# EAGLE board BlueCom_Board (EAGLE 6.2)
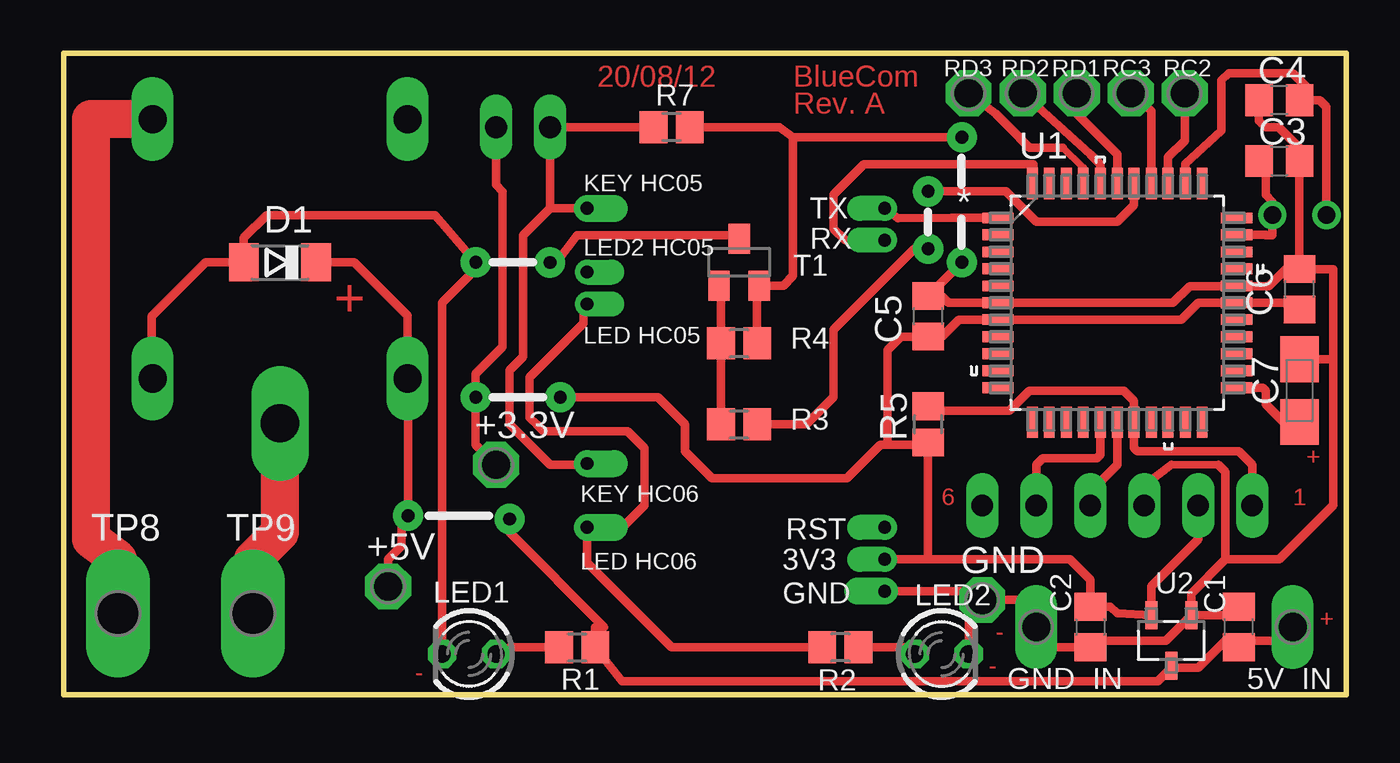
[diagram p0: board, top side]
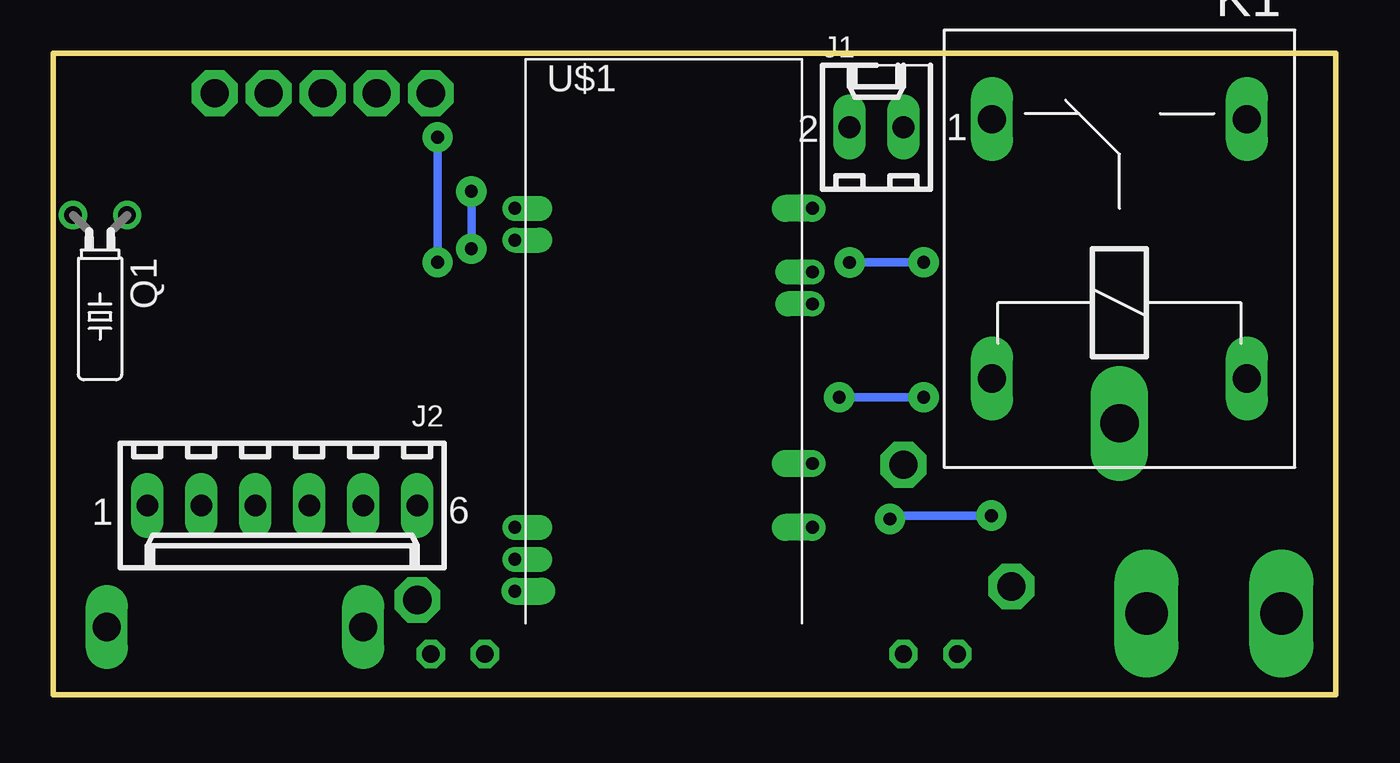
[diagram p1: board, bottom side, seen from below]

Size 60.3 x 30.15 mm. Coordinates in mm from the lower left corner, seen from the top.
Outline: 0,0 60.3,0 60.3,30.15 0,30.15 0,0
Copper layers (1*16): Top 0.035mm / dielectric 1.5mm / Bottom 0.035mm
Design rules: minimum track width 10mil, minimum drill 24mil, track to track 8mil, track to pad 8mil, pad to pad 8mil, via to via 8mil, smd to smd 8mil, copper to edge 0.5mm, drill to drill 6mil, minimum pad ring 10mil, minimum via ring 8mil, stop-mask expansion 4mil, vias tented up to drill 0mil, thermal gap 10mil

## Footprints (pad centres in the part's own frame; a part is rotated, then mirrored left to right if it is on the bottom)
P1-13Y = drill 1.321 pad 1.905 long: TP 0,0
P1-13 = drill 1.321 pad 2.159 octagon: TP 0,0
C0805 = smd 1.3 x 1.5: 1 -0.95,0; 2 0.95,0
A/3216-18W = smd 2.15 x 1.8: + 1.475,0; - -1.475,0
SOD80C = smd 1.4 x 1.8: A 1.7,0; C -1.7,0
6410-02 = drill 1.016 long: 1 1.27,0; 2 -1.27,0
6410-06 = drill 1.016 long: 1 6.35,0; 2 3.81,0; 3 1.27,0; 4 -1.27,0; 5 -3.81,0; 6 -6.35,0
ZF112 = drill 1.321 long: 1 -6.096,5.994; 2 -6.096,-5.994; O 6.096,5.994; S 6.096,-5.994 | drill 1.803 long: P -8.204,0
LED3MM = drill 0.813 octagon: A -1.27,0; K 1.27,0
TC26H = drill 0.813: 1 -1.27,0; 2 1.27,0
R0805 = smd 1.3 x 1.5: 1 -0.85,0; 2 0.85,0
SOT23 = smd 1 x 1.4: 1 -0.95,-1.1; 2 0.95,-1.1; 3 0,1.1
P1-20Y = drill 2.007 pad 2.54 long: TP 0,0
QFP80P1200X1200X120-44N = smd 1.473 x 0.508: 1 -5.613,3.988; 2 -5.613,3.2; 3 -5.613,2.388; 4 -5.613,1.6; 5 -5.613,0.787; 6 -5.613,0; 7 -5.613,-0.787; 8 -5.613,-1.6; 9 -5.613,-2.388; 10 -5.613,-3.2; 11 -5.613,-3.988; 23 5.613,-3.988; 24 5.613,-3.2; 25 5.613,-2.388; 26 5.613,-1.6; 27 5.613,-0.787; 28 5.613,0; 29 5.613,0.787; 30 5.613,1.6; 31 5.613,2.388; 32 5.613,3.2; 33 5.613,3.988 | smd 0.508 x 1.473: 12 -3.988,-5.613; 13 -3.2,-5.613; 14 -2.388,-5.613; 15 -1.6,-5.613; 16 -0.787,-5.613; 17 0,-5.613; 18 0.787,-5.613; 19 1.6,-5.613; 20 2.388,-5.613; 21 3.2,-5.613; 22 3.988,-5.613; 34 3.988,5.613; 35 3.2,5.613; 36 2.388,5.613; 37 1.6,5.613; 38 0.787,5.613; 39 0,5.613; 40 -0.787,5.613; 41 -1.6,5.613; 42 -2.388,5.613; 43 -3.2,5.613; 44 -3.988,5.613
SOT95P255X145-3N = smd 0.559 x 1.321: 1 -0.94,-1.194; 2 0.94,-1.194; 3 0,1.194
BLUETOOTH_TRAVERSANT = drill 0.6 pad 1.17 offset: 1 -0.5,0; 2 -0.5,-1.5; 11 -0.5,-15; 12 -0.5,-16.5; 31 13.5,-4.5; 32 13.5,-3 | drill 0.6 pad 1.27 offset: 13 -0.5,-18; 24 13.5,-15; 26 13.5,-12; 34 13.5,0

## Placement (x,y rotation side)
5V_IN  TPPAD1-13Y  [P1-13Y]  57.78,3.17 0 top
+3.3V  TPPAD1-13  [P1-13]  20.32,10.79 0 top
+5V  TPPAD1-13  [P1-13]  15.24,5.08 0 top
C1  1µF 25V  [C0805]  55.24,3.17 90 top
C2  1µF 25V  [C0805]  48.26,3.17 270 top
C3  12pF  [C0805]  57.15,25.08 0 top
C4  12pF  [C0805]  57.15,27.94 180 top
C5  100nF  [C0805]  40.64,17.78 90 top
C6  100nF  [C0805]  58.1,19.05 90 top
C7  10 µF  [A/3216-18W]  58.1,14.29 270 top
D1  LL4148  [SOD80C]  10.16,20.32 180 top
GND  TPPAD1-13  [P1-13]  43.18,4.45 0 top
GND_IN  TPPAD1-13Y  [P1-13Y]  45.72,3.17 0 top
J1  Con 2.45mm  [6410-02]  21.59,26.67 0 bottom
J2  Con 5pts 2.54mm  [6410-06]  49.53,8.89 180 bottom
K1  Relay 5V  [ZF112]  10.16,20.95 90 bottom
LED1  Green 3mm  [LED3MM]  19.05,1.91 180 top
LED2  Blue 3mm  [LED3MM]  41.27,1.91 0 top
Q1  32.768 kHz  [TC26H]  58.1,22.54 180 bottom
R1  680  [R0805]  24.13,2.22 0 top
R2  680  [R0805]  36.51,2.22 180 top
R3  5.6K  [R0805]  31.75,12.7 0 top
R4  47K  [R0805]  31.75,16.51 180 top
R5  10K  [R0805]  40.64,12.7 90 top
R7  10K  [R0805]  28.57,26.67 180 top
RC2  TPPAD1-13  [P1-13]  52.71,28.26 0 top
RC3  TPPAD1-13  [P1-13]  50.17,28.26 0 top
RD1  TPPAD1-13  [P1-13]  47.62,28.26 0 top
RD2  TPPAD1-13  [P1-13]  45.09,28.26 0 top
RD3  TPPAD1-13  [P1-13]  42.55,28.26 0 top
T1  BC846  [SOT23]  31.75,20.32 0 top
TP8  TPPAD1-13Y  [P1-20Y]  2.54,3.81 0 top
TP9  TPPAD1-13Y  [P1-20Y]  8.89,3.81 0 top
U1  PIC18F44J11-I/PT  [QFP80P1200X1200X120-44N]  49.53,18.41 0 top
U2  MCP1702T-3302E/CB  [SOT95P255X145-3N]  52.07,2.54 180 top
U$1  BLUETOOTH_TRAVERSANT  [BLUETOOTH_TRAVERSANT]  38.1,22.86 0 bottom

## Library data of the parts
5V_IN +3.3V +5V GND GND_IN RC2 RC3 RD1-RD3 TP8 TP9 = testpad
C1-C7 = rcl
D1 = diode
J1 J2 = con-molex; OC_FARNELL: unknown; OC_NEWARK: unknown
K1 = relay; OC_FARNELL: unknown; OC_NEWARK: unknown
LED1 LED2 = led
Q1 = crystal; OC_FARNELL: unknown; OC_NEWARK: unknown
R1-R5 R7 = resistor
T1 = transistor
U1 = BlueCom_Lib; DESCRIPTION: 8BIT MCU; MPN: pic18f44j11-I/pt; OC_FARNELL: 1702900; OC_NEWARK: 98M1811; PACKAGE: TQFP-44; SUPPLIER: Microchip
U2 = BlueCom_Lib; MPN: MCP1702T-3302E/CB; OC_FARNELL: 1331490; OC_NEWARK: 84R5179; PACKAGE: SOT23-3; SUPPLIER: Microchip
U$1 = BlueCom_Lib

## Nets
+3V3: +3.3V.TP C2.1 C5.1 C6.1 J1.1 J2.2 R5.1 U1.7 U1.28 U2.2 U$1.12
+5V: 5V_IN.TP +5V.TP C1.1 D1.C K1.1 R1.2 U2.3
GND: C1.2 C2.2 C3.2 C4.2 C5.2 C6.2 C7.- GND.TP GND_IN.TP J2.3 LED2.K R4.1 R7.1 T1.2 U1.6 U1.29 U2.1 U$1.13
N$1: D1.A K1.2 LED1.K T1.3
N$2: R3.1 R4.2 T1.1
N$3: RD3.TP U1.41
N$4: LED1.A R1.1
N$5: LED2.A R2.1
N$6: R2.2 U$1.24 U$1.31
N$7: J1.2 R7.2 U$1.26 U$1.34
N$8: U1.44 U$1.2
N$9: U1.1 U$1.1
N$10: K1.S TP8.TP
N$11: K1.P TP9.TP
N$12: J2.1 R5.2 U1.18
N$13: C4.1 Q1.2 U1.35
N$14: C3.1 Q1.1 U1.32
N$15: J2.5 U1.16
N$16: RD2.TP U1.40
N$17: C7.+ U1.23
N$18: R3.2 U1.38
N$19: J2.4 U1.17
N$20: RD1.TP U1.39
N$21: RC2.TP U1.36
N$22: RC3.TP U1.37

## Tracks (layer width: path | path; a pad name or v marks a point on that pad's centre or on a via)
+3V3  (via drill 0.6 pad 1.42)
  Top 0.406: C6.1 58.1,18.41 U1.28 53.34,18.41 52.55,17.63 U1.7 42.08,17.63 41.27,16.83 C5.1 | J2.2 53.34,7.3 51.13,5.09 U2.2 49.53,3.81 49.21,4.13 C2.1 48.26,5.4 47.31,6.35 40.64,6.35 | C5.1 | C5.1 39.37,16.83 38.73,16.19 38.73,11.75 40.01,11.75 | 40.01,11.75 40.54,11.75 R5.1 40.64,6.35 | 40.64,6.35 U$1.12 | v23.34,13.97 27.94,13.97 29.21,12.7 29.21,11.43 30.48,10.16 36.82,10.16 38.41,11.74 40,11.74 40.01,11.75 | J1.1 20.32,23.96 20.63,23.65 20.63,16.35 19.36,15.08 v19.36,13.98 | v19.36,13.98 v19.37,13.97 | v19.36,13.98 19.36,11.75 +3.3V.TP
  Bottom 0.406: v19.37,13.97 v23.34,13.97
+5V  (via drill 0.6 pad 1.42)
  Top 0.406: 52.07,1.27 53.34,1.27 54.61,2.54 C1.1 55.88,2.54 57.15,2.54 5V_IN.TP | 52.07,1.27 U2.3 | D1.C 13.65,20.32 16.15,17.82 K1.1 16.19,14.83 v16.19,8.41 15.88,8.1 15.88,6.99 15.24,6.35 +5V.TP | 52.07,1.27 51.44,0.64 26.25,0.64 R1.2 24.98,3.17 25.4,3.17 20.95,7.62 v20.95,8.26
  Bottom 0.406: v16.19,8.41 20.8,8.41 v20.95,8.26
GND  (via drill 0.6 pad 1.42)
  Top 0.356: 54.29,10.79 52.07,10.79
  Top 0.406: C6.2 57.47,20 56.67,19.2 U1.29 52.94,19.2 52.15,18.41 U1.6 41.59,18.41 41.27,18.73 C5.2 v42.23,20.32 | 58.42,20 C6.2 | U2.1 51.82,2.54 48.26,2.54 C2.2 46.35,2.22 45.72,2.86 GND_IN.TP 45.72,4.45 GND.TP | U2.1 54.85,3.73 C1.2 | U2.1 53.01,4.75 54.61,6.35 | 54.61,6.35 54.61,10.48 54.29,10.79 | 52.07,10.79 50.8,9.84 J2.3 | 59.17,15.76 C7.- 59.69,15.76 | 59.69,15.76 59.69,8.89 57.15,6.35 54.61,6.35 | 59.69,15.76 59.69,20 58.42,20 | 58.42,20 C6.2 | C6.2 | v42.23,26.19 34.29,26.19 | R4.1 32.6,19.12 T1.2 33.83,19.22 34.29,19.68 34.29,26.19 | C4.2 56.2,26.98 56.52,26.67 57.12,26.67 58.08,25.71 58.08,25.1 C3.2 C6.2 | R7.1 33.66,26.67 34.29,26.19 | U$1.13 42.77,4.86 GND.TP | LED2.K 42.55,3.81 GND.TP
  Bottom 0.406: v42.23,20.32 v42.23,26.19
N$1  (via drill 0.6 pad 1.42)
  Top 0.406: K1.2 4.13,14.86 4.13,17.78 6.67,20.32 D1.A 8.46,21.48 9.53,22.54 17.46,22.54 v19.37,20.32 19.37,20 17.77,18.41 LED1.K | v22.85,20.31 23.17,20.31 24.13,21.59 31.58,21.59 T1.3
  Bottom 0.406: v19.37,20.32 22.53,20.32 v22.85,20.31
N$2
  Top 0.406: R3.1 R4.2 30.9,19.12 T1.1
N$3
  Top 0.33: 47.93,24.75 46.98,25.71
  Top 0.356: U1.41 47.93,24.75
  Top 0.406: 46.98,25.71 45.41,25.71 44.45,26.67 43.81,27.3 RD3.TP
N$4
  Top 0.406: LED1.A 20.95,2.22 R1.1
N$5
  Top 0.406: LED2.A 39.69,2.22 R2.1
N$6
  Top 0.406: 24.65,18.31 U$1.31 24.44,18.2 24.44,17.46 22.86,15.88 21.9,14.92 21.9,13.01 22.21,12.7 22.23,12.7 22.55,12.38 26.5,12.38 27.3,11.58 27.3,8.89 26.27,7.86 U$1.24 24.6,6.19 28.57,2.22 R2.2
N$7
  Top 0.406: R7.2 J1.2 22.86,22.86 | U$1.34 22.86,22.86 | 22.86,22.86 21.59,21.59 21.59,15.88 20.95,15.24 20.95,12.7 22.86,10.79 24.54,10.79 U$1.26
N$8
  Top 0.406: U$1.2 36.74,21.36 36.2,21.91 36.2,23.5 37.62,24.92 45.6,24.92 U1.44
N$9
  Top 0.406: U1.1 41.73,22.4 39.21,22.38 U$1.1
N$10
  Top 1.27: 2.54,6.35 TP8.TP
  Top 1.778: K1.S 1.27,27.05 1.27,7.3 2.54,6.35
N$11
  Top 1.27: TP9.TP 8.89,6.35
  Top 1.778: 8.89,6.35 10.16,7.62 K1.P
N$12
  Top 0.406: J2.1 55.88,10.79 55.24,11.43 50.48,11.43 50.32,11.6 U1.18 50.32,13.82 49.85,14.29 45.4,14.29 44.45,13.34 40.85,13.34 R5.2
N$13
  Top 0.406: U1.35 52.73,24.96 54.43,26.5 54.43,28.88 54.77,29.21 57.78,29.21 58.42,28.57 58.42,28.26 C4.1 59.05,27.94 59.37,27.62 Q1.2
N$14
  Top 0.406: C3.1 56.52,24.77 56.52,23.5 56.83,23.18 Q1.1 56.83,21.59 56.52,21.59 56.52,21.61 U1.32
N$15
  Top 0.406: U1.16 48.74,11.28 48.58,11.11 46.04,11.11 45.72,10.79 J2.5
N$16
  Top 0.406: U1.40 48.74,24.92 48.26,25.4 | 48.26,25.4 | 48.26,25.4 RD2.TP
N$17
  Top 0.406: U1.23 56.38,14.43 56.52,14.29 56.52,13.65 57.47,12.7 57.99,12.7 C7.+
N$18  (via drill 0.6 pad 1.42)
  Top 0.406: U1.38 50.32,23.01 49.53,22.23 45.72,22.23 44.29,23.65 v40.64,23.65 | v40.64,20.95 40.01,20.95 36.2,17.14 36.2,13.97 34.92,12.7 R3.2
  Bottom 0.406: v40.64,23.65 v40.64,20.95
N$19
  Top 0.406: U1.17 49.53,10.79 48.26,9.53 J2.4
N$20
  Top 0.406: U1.39 49.53,25.4 47.62,27.3 RD1.TP
N$21
  Top 0.406: U1.36 51.92,25.25 52.7,26.04 52.7,28.58 RC2.TP
N$22
  Top 0.406: U1.37 51.13,27.45 RC3.TP

## Text on the board
Top: 20/08/12 | BlueCom | Rev. A | + | + | 6 | 1 | - | + | - | -
tPlace: KEY HC05 | TX | LED2 HC05 | RX | LED HC05 | KEY HC06 | RST | LED HC06 | 3V3 | GND